# Altium PCB H bridge pcb.PcbDoc
Units mil, origin at the board's own origin, x right, y up, seen from the top; angles counter-clockwise.
Board outline 6000 x 4000 mil, 2 copper layers (Top Layer, Bottom Layer); 34 components, 6 nets, 68 pads, 0 vias.
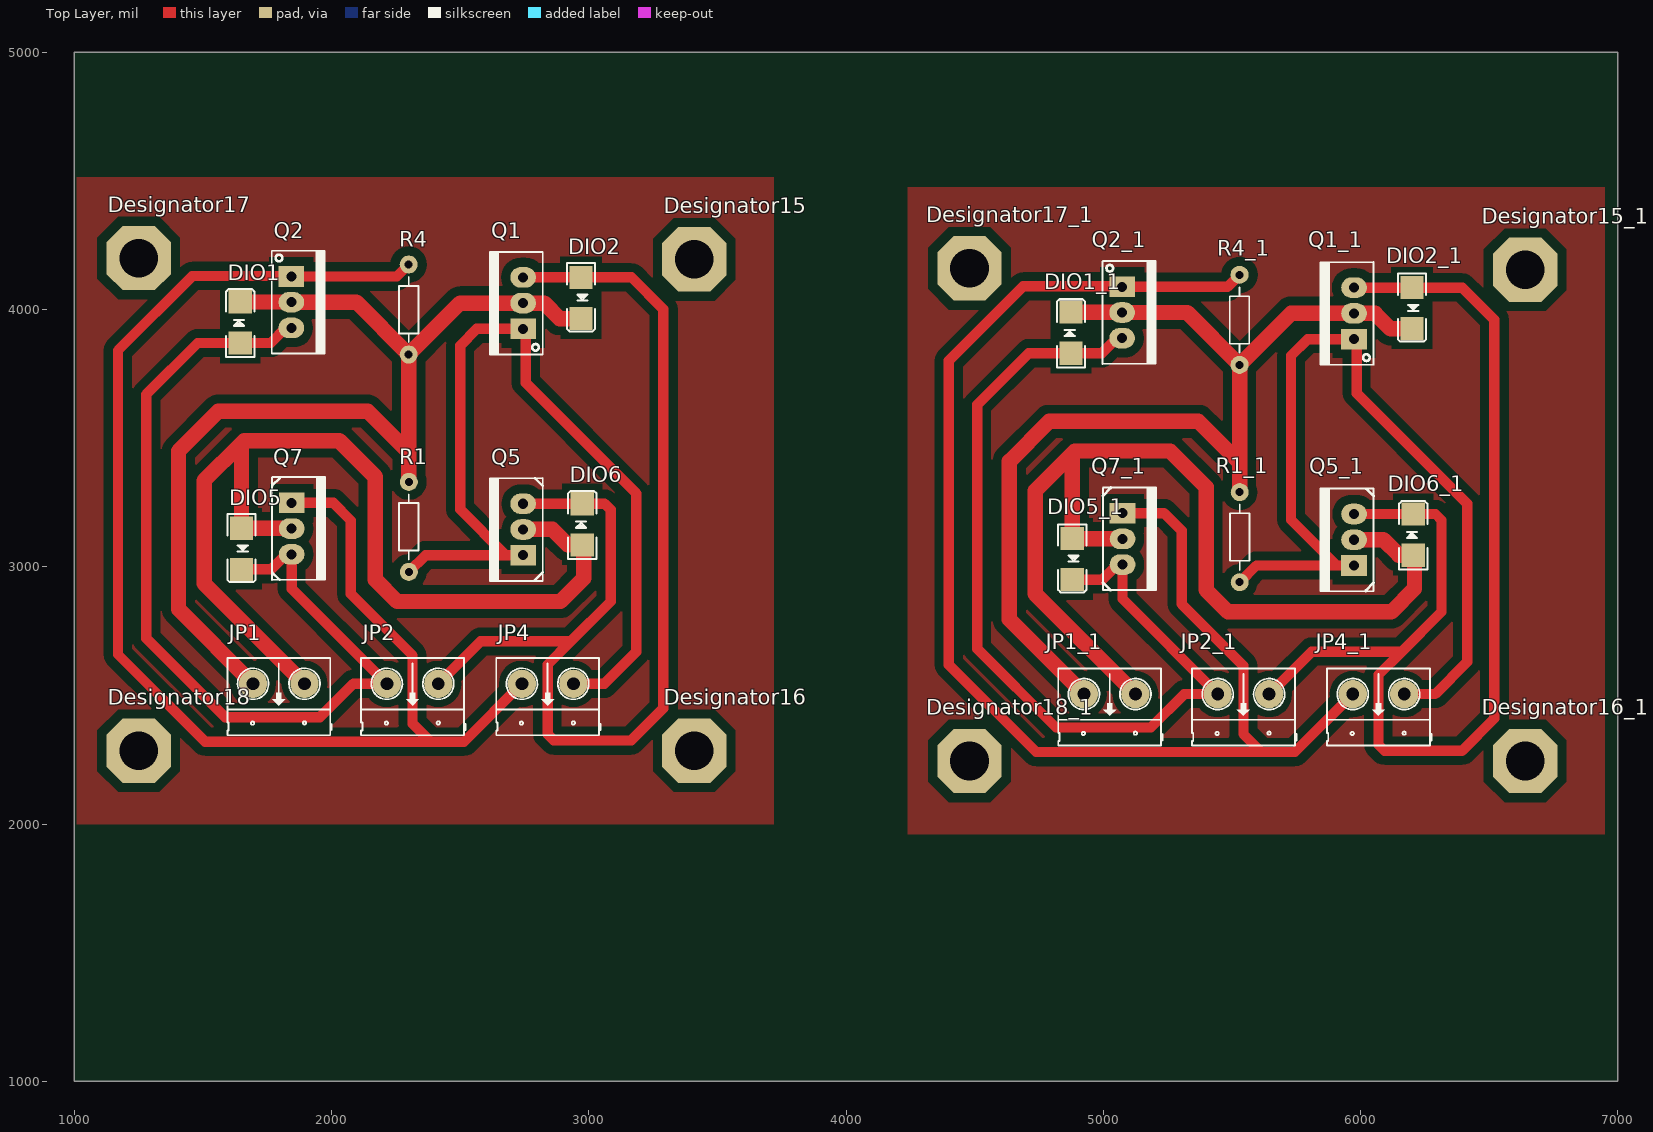
[diagram p0: Top Layer view]
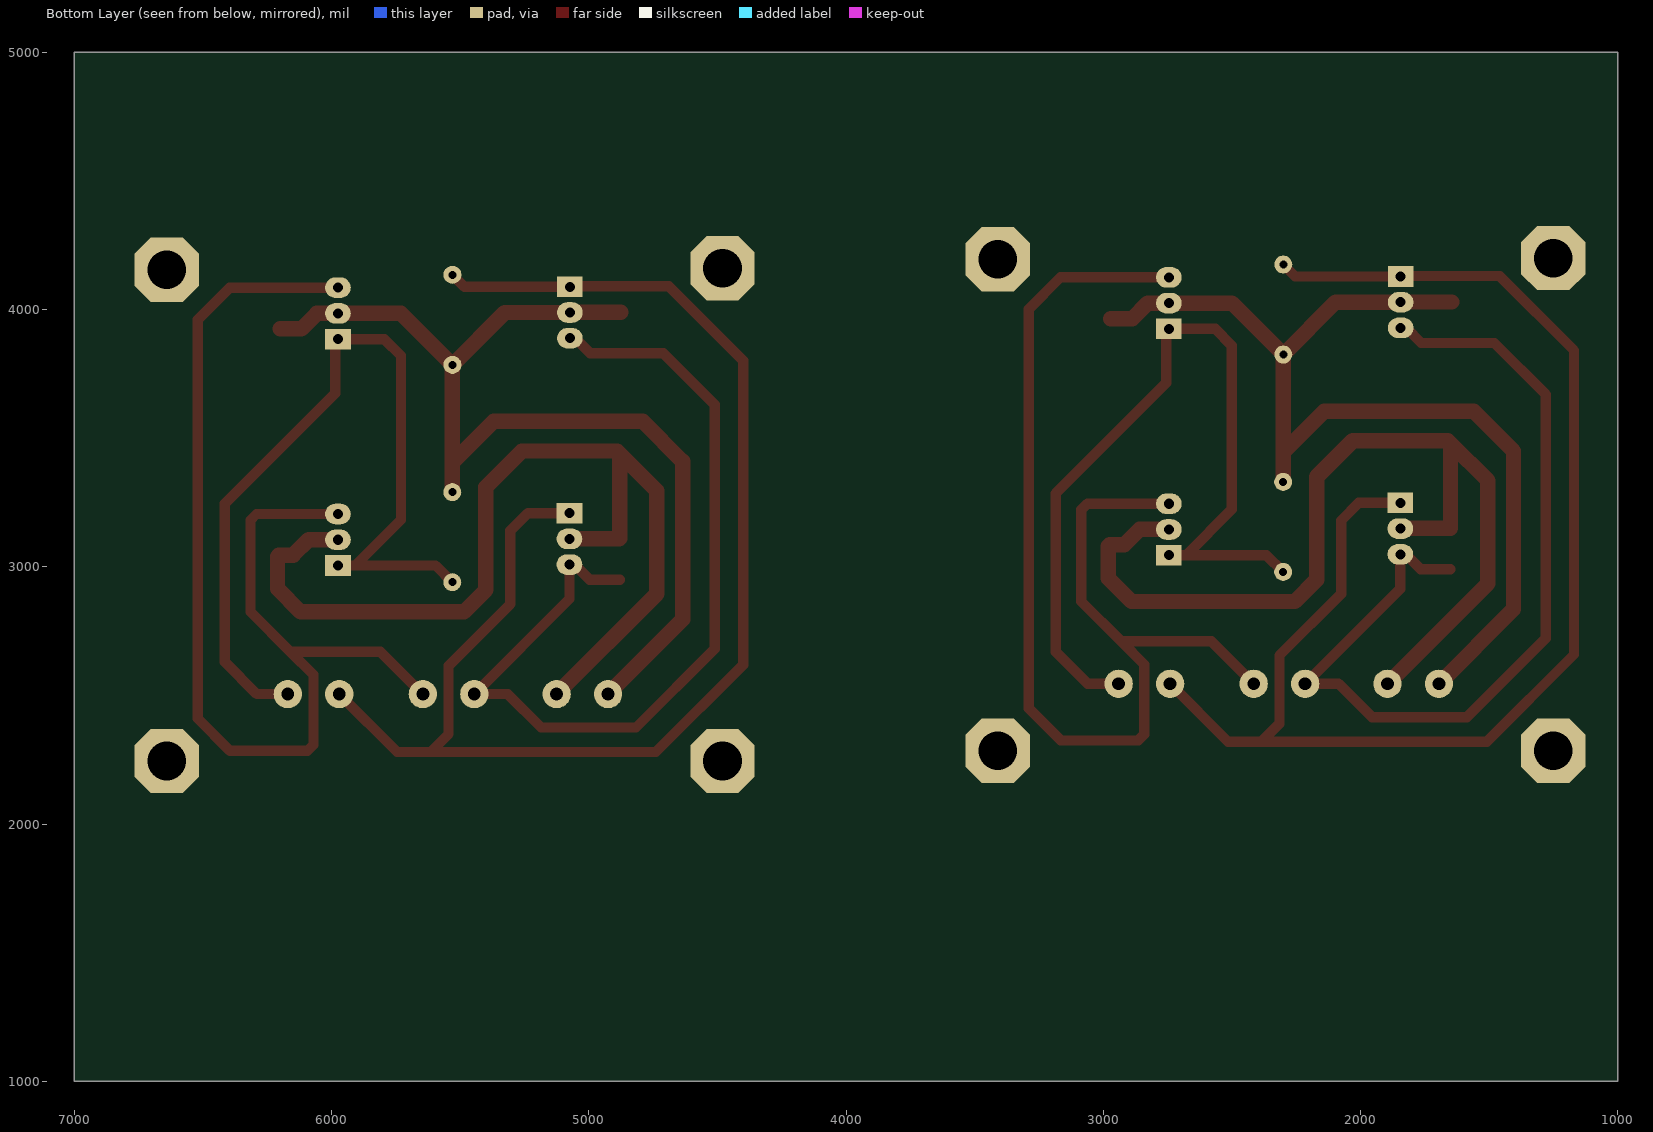
[diagram p1: Bottom Layer view, seen from below]
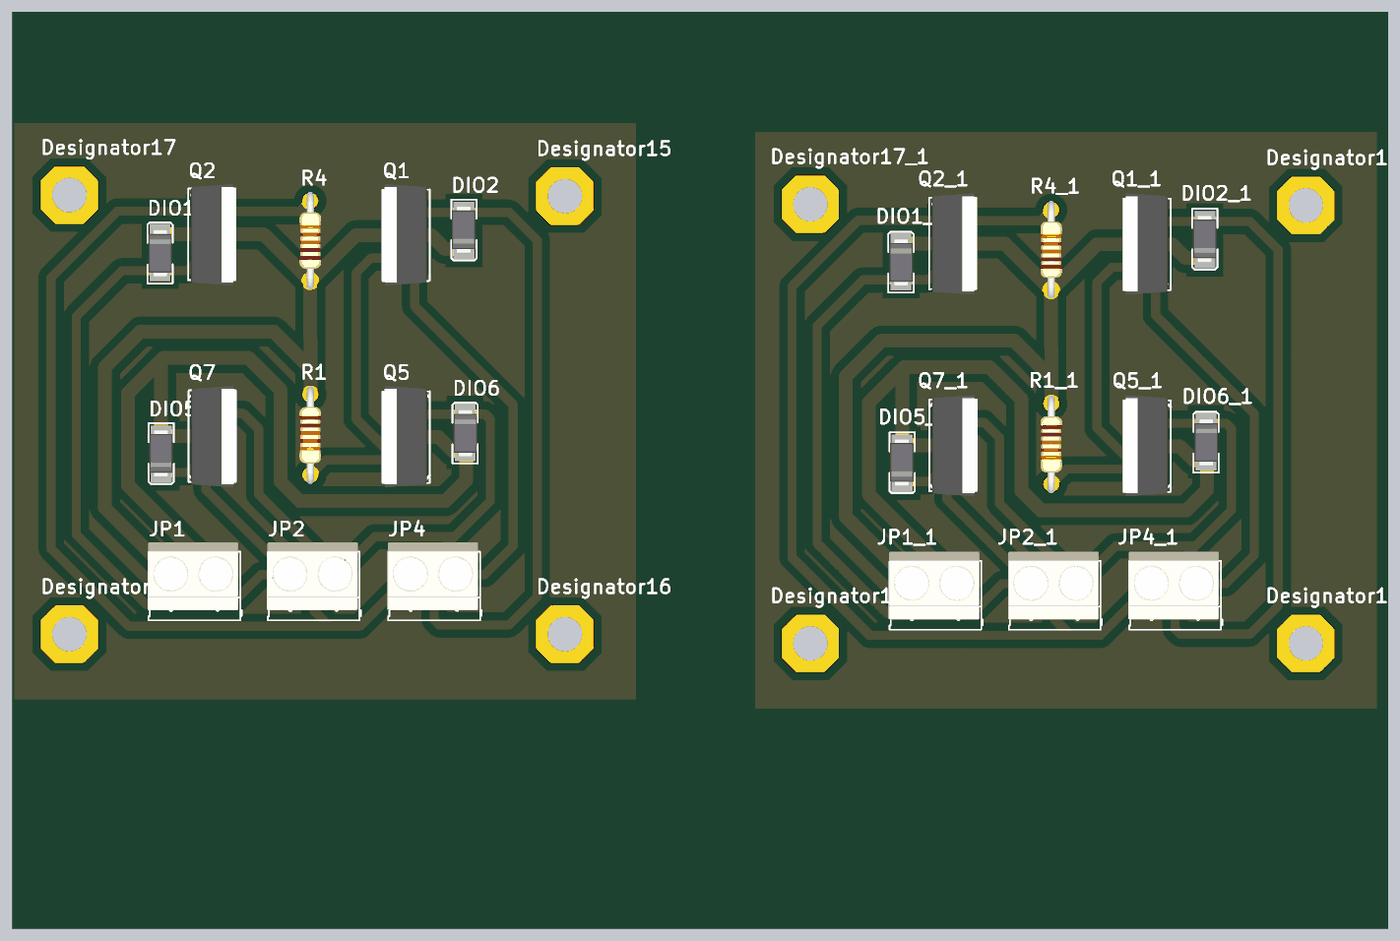
[diagram p2: 3D render of the assembled board from above, using the file's embedded part models]

## Layer stack, top to bottom
Top Solder: solder mask 0.4, Solder Resist, Dk 3.5
Top Layer: signal copper 1.4
Dielectric 1: dielectric 12.6, FR-4, Dk 4.8
Bottom Layer: signal copper 1.4
Bottom Solder: solder mask 0.4, Solder Resist, Dk 3.5

## Board outline
1000,1000 7000,1000 7000,5000 1000,5000

## Design rules (kind name [scope] priority, off if disabled: settings)
Clearance [All] p1: gap=35 ignorepadtopadclearanceinfootprint=FALSE
PlaneConnect [All] p1: planeconnectstyle=Relief reliefexpansion=20 reliefentries=4 reliefconductorwidth=20 reliefairgap=20
PolygonConnect [All] p1: connectstyle=Direct reliefconductorwidth=10 reliefentries=4 polygonreliefangle="90 Angle" airgapwidth=10
RoutingLayers [All] p1: top layer_v5=TRUE bottom layer_v5=FALSE
RoutingVias [All] p1: holewidth=28 width=50 viastyle="Through Hole" minholewidth=28 minwidth=50 maxholewidth=28 maxwidth=50
SolderMaskExpansion [All] p1: expansion=4 istentingtop=FALSE
Width [All] p1: maxlimit=60 minlimit=40 preferedwidth=50
28 further rules are at their usual default settings.

## Classes and differential pairs
component class "H bridge": DIO1 DIO2 DIO5 DIO6 JP1 JP2 JP4 Q1 Q2 Q5 Q7 R1 R4

## Components (designator, comment, footprint, x,y, rotation, side; value= is the part's Value field where it differs from the comment)
Designator15 "Comment" VIT 3410,4195 r0 top
Designator15_1 "Comment" VIT 6640,4155 r0 top
Designator16 "Comment" VIT 3410,2285 r0 top
Designator16_1 "Comment" VIT 6640,2245 r0 top
Designator17 "Comment" VIT 1250,4200 r0 top
Designator17_1 "Comment" VIT 4480,4160 r0 top
Designator18 "Comment" VIT 1250,2285 r0 top
Designator18_1 "Comment" VIT 4480,2245 r0 top
DIO1 "Diode SMD" DIO-SMD-106 1645,3950 r270 top value=1N5007
DIO1_1 "Diode SMD" DIO-SMD-106 4875,3910 r270 top value=1N5007 (schematic designator DIO1)
DIO2 "Diode SMD" DIO-SMD-106 2970,4045 r90 top value=1N5007
DIO2_1 "Diode SMD" DIO-SMD-106 6200,4005 r90 top value=1N5007 (schematic designator DIO2)
DIO5 "Diode SMD" DIO-SMD-106 1650,3070 r90 top value=1N5007
DIO5_1 "Diode SMD" DIO-SMD-106 4880,3030 r90 top value=1N5007 (schematic designator DIO5)
DIO6 "Diode SMD" DIO-SMD-106 2975,3165 r270 top value=1N5007
DIO6_1 "Diode SMD" DIO-SMD-106 6205,3125 r270 top value=1N5007 (schematic designator DIO6)
JP1 "Header 2_1" HED2 1895,2545 r180 top value="Header 2"
JP1_1 "Header 2_1" HED2 5125,2505 r180 top value="Header 2" (schematic designator JP1)
JP2 "Header 2_1" HED2 2415,2545 r180 top value="Header 2"
JP2_1 "Header 2_1" HED2 5645,2505 r180 top value="Header 2" (schematic designator JP2)
JP4 "Header 2_1" HED2 2940,2545 r180 top value="Header 2"
JP4_1 "Header 2_1" HED2 6170,2505 r180 top value="Header 2" (schematic designator JP4)
Q1 "IRF840" QTO-220 2745,3925 r90 top
Q1_1 "IRF840" QTO-220 5975,3885 r90 top (schematic designator Q1)
Q2 "IRF840" QTO-220 1843.5,4128.47 r270 top
Q2_1 "IRF840" QTO-220 5073.5,4088.47 r270 top (schematic designator Q2)
Q5 "IRF9540" QTO-220 2745,3045 r90 top
Q5_1 "IRF9540" QTO-220 5975,3005 r90 top (schematic designator Q5)
Q7 "IRF9540" QTO-220 1845,3248.46 r270 top
Q7_1 "IRF9540" QTO-220 5075,3208.46 r270 top (schematic designator Q7)
R1 "1k" R1/4W 2300.49,2980 r90 top value="R1/4W - 1K"
R1_1 "1k" R1/4W 5530.49,2940 r90 top value="R1/4W - 1K" (schematic designator R1)
R4 "1k" R1/4W 2300,4175 r270 top value="R1/4W - 1K"
R4_1 "1k" R1/4W 5530,4135 r270 top value="R1/4W - 1K" (schematic designator R4)

## Footprints (in the part's own frame and the unit in brackets; to place one, negate y for a bottom-side part, rotate by r counter-clockwise, add the part's x,y. Pads: shape width x height; smd on the part's side, far side on the other; paste and mask are expansions set on the pad)
DIO-SMD-106 [mil]
  rect 90x90.55 smd: 1(80,0) 2(-80,0)
  silkscreen extent -130,-55 135,55, body extent -99,-50 106,52, height 95
HED2 [mil] "Header 2, 2 pin, hight 300mil, Pin to Pin 200, Colour Green"
  round 110 hole 50: 1(0,0) 2(200,0)
  silkscreen extent -106,-100 300,200, body extent -92,-140 302,155, height 394
QTO-220 [mil] "TO-220 - 1-2-3"
  rect 80x100 hole 39: 1(0,0)
  oval 80x100 hole 39: 2(100,0) 3(200,0)
  silkscreen extent -100,-76 300,130, body extent -119,-64 322,121, height 755
R1/4W [mil] "R 1/4W, 2 Pin, 350mil"
  round 70 hole 31: 1(0,0) 2(350,0)
  silkscreen extent 48,-38 302,38, body extent -40,-47 386,47, height 111
VIT [mil] "VIT"
  oct 250x250 hole 150: VIT1(0,0)

## Part data
DIO1 DIO1_1 DIO2 DIO2_1 DIO5 DIO5_1 DIO6 DIO6_1: "Default Diode", Code - JEDEC=DO-214-AB, Published=8-Jun-2000, Publisher="Altium Limited", Revision="July-2002: Re-released for DXP Platform."
JP1 JP1_1 JP2 JP2_1 JP4 JP4_1: "Header, 2-Pin", Manufacturer="Generic Components", Class=Connector
Q1 Q1_1 Q2 Q2_1: "MOSFET N - CHANNEL 500V - 0.75 - 8A - TO-220"
Q5 Q5_1 Q7 Q7_1: "HEXFET P-Channel Power MOSFET", ComponentLink1Description="Manufacturer Link", ComponentLink1URL=http://www.irf.com/, ComponentLink2Description=Datasheet, ComponentLink2URL=http://www.irf.com/product-info/datasheets/data/irf9540.pdf, DatasheetVersion=PD-9.421C, LatestRevisionDate=17-Jul-2002, LatestRevisionNote="Re-released for DXP Platform.", Note="Pin 2 is electrically connected to pin 4.", PackageDescription="TO, Thru-Hole, Vertical, Heatsink Mounted; 3 In-Line Leads; Pitch 2.54 mm", PackageReference=TO-220AB, PackageVersion=Feb-1997, Published=8-Jun-2000, Publisher="Altium Limited"
R1 R1_1 R4 R4_1: library part R1/4W, "Resistor 1/4W"

## Nets (pads, with @x,y where several pads share a name; then routed paths per layer and width w, separated by ;. In a path a pad name is that pad's centre, name@x,y a point inside that pad or via, vN(x,y) a via of type N, cw(c..) or ccw(c..) an arc to the next point about the centre after c; other vN are vias at no path point)
+12: DIO1.2 DIO2.2 JP1.2 Q1.2 Q2.2 R1.2 R4.2 | length 4064.1
  Top Layer w40: DIO1.2 DIO1.2@1645.77,4029.23 ; Q2.2@1842.73,4029.23 Q2.2 ; 2300,3577.49 2300.49,3577
  Top Layer w60: DIO1.2@1645.77,4029.23 Q2.2@1842.73,4029.23 ; JP1.2 1405,2835 1405,3450 1560,3605 2140,3605 2300.49,3444.51 ; Q2.2 2096.53,4028.47 R4.2 ; 2300,3577.49 R4.2 ; R1.2 2300.49,3444.51 ; 2300.49,3577 2300.49,3444.51 ; DIO2.2 2887,3965 2827,4025 Q1.2 2500,4025 R4.2
GND: DIO5.1 DIO6.1 JP1.1 Q5.2 Q7.2 | length 3933.8
  Top Layer w40: DIO5.1 DIO5.1@1650.77,3149.23 ; 1650,3480 1660,3490 ; Q7.2@1844.23,3149.23 Q7.2 ; DIO6.1 DIO6.1@2980,3080
  Top Layer w60: DIO5.1 1650,3480 1505,3335 1505,2935 JP1.1 ; DIO5.1@1650.77,3149.23 Q7.2@1844.23,3149.23 ; 1660,3490 2030,3490 2170,3350 2170,2950 2255,2865 2890,2865 2980,2955 DIO6.1@2980,3080 ; Q5.2 2859,3145 2919,3085 DIO6.1
NetDIO1_1: DIO1.1 DIO5.2 JP2.2 Q2.3 Q7.3 | length 3610.9
  Top Layer w40: DIO5.2 1765.71,2990 1824.18,3048.46 Q7.3 1845,2915 JP2.2 2085,2545 1955,2415 1586.39,2415 1280,2721.39 1280,3670 1480,3870 DIO1.1 1764.21,3870 1822.68,3928.47 Q2.3
NetDIO2_1: DIO2.1 DIO6.2 JP2.1 Q1.3 Q5.3 | length 4566.5
  Top Layer w40: JP2.1 2580,2710 2930,2710 ; Q5.3 DIO6.2 3061.57,3245 3085,3221.57 3085,2865 2930,2710 ; Q1.3 DIO2.1 3166,4125 3290,4001 3290,2450 3165,2325 2863.43,2325 2840,2348.43 2840,2620 2930,2710
NetJP4_1: JP4.1 Q1.1 Q5.1 R1.1 | length 3372
  Top Layer w40: R1.1 2365.49,3045 2678,3045 ; Q5.1 2678,3045 ; JP4.1 3060,2545 3185,2670 3185,3285 2755,3715 2755,3925 2565,3925 2500,3860 2500,3223 2678,3045
NetJP4_2: JP4.2 Q2.1 Q7.1 R4.1 | length 5502
  Top Layer w40: Q7.1 2006.54,3248.46 2075,3180 2075,2895 2315,2655 2315,2390 2385,2320 ; R4.1 2253.47,4128.47 Q2.1 1841.97,4130 1459,4130 1170,3841 1170,2659 1509,2320 2385,2320 ; JP4.2 2515,2320 2385,2320
pads on no net: Designator15.VIT1 Designator15_1.VIT1 Designator16.VIT1 Designator16_1.VIT1 Designator17.VIT1 Designator17_1.VIT1 Designator18.VIT1 Designator18_1.VIT1 DIO1_1.1 DIO1_1.2 DIO2_1.1 DIO2_1.2 DIO5_1.1 DIO5_1.2 DIO6_1.1 DIO6_1.2 JP1_1.1 JP1_1.2 JP2_1.1 JP2_1.2 JP4_1.1 JP4_1.2 Q1_1.1 Q1_1.2 Q1_1.3 Q2_1.1 Q2_1.2 Q2_1.3 Q5_1.1 Q5_1.2 Q5_1.3 Q7_1.1 Q7_1.2 Q7_1.3 R1_1.1 R1_1.2 R4_1.1 R4_1.2
copper on no net: | length 25049.2
  Top Layer w40: 4875,3990 4875.77,3989.23 ; 4880,2950 4995.71,2950 5054.18,3008.46 5075,3008.46 5075,2875 5445,2505 5315,2505 5185,2375 4816.39,2375 4510,2681.39 4510,3630 4710,3830 4875,3830 4994.21,3830 5052.68,3888.47 5073.5,3888.47 ; 4880,3110 4880.77,3109.23 ; 4880,3440 4890,3450 ; 5072.73,3989.23 5073.5,3988.47 ; 5074.23,3109.23 5075,3108.46 ; 5075,3208.46 5236.54,3208.46 5305,3140 5305,2855 5545,2615 5545,2350 5615,2280 ; 5530,3537.49 5530.49,3537 ; 5530,4135 5483.47,4088.47 5073.5,4088.47 5071.97,4090 4689,4090 4400,3801 4400,2619 4739,2280 5615,2280 ; 5530.49,2940 5595.49,3005 5908,3005 ; 5645,2505 5810,2670 6160,2670 ; 5970,2505 5745,2280 5615,2280 ; 5975,3005 5908,3005 ; 5975,3205 6205,3205 6291.57,3205 6315,3181.57 6315,2825 6160,2670 ; 5975,4085 6200,4085 6396,4085 6520,3961 6520,2410 6395,2285 6093.43,2285 6070,2308.43 6070,2580 6160,2670 ; 6170,2505 6290,2505 6415,2630 6415,3245 5985,3675 5985,3885 5795,3885 5730,3820 5730,3183 5908,3005 ; 6205,3045 6210,3040
  Top Layer w60: 4875.77,3989.23 5072.73,3989.23 ; 4880,3110 4880,3440 4735,3295 4735,2895 5125,2505 ; 4880.77,3109.23 5074.23,3109.23 ; 4890,3450 5260,3450 5400,3310 5400,2910 5485,2825 6120,2825 6210,2915 6210,3040 ; 4925,2505 4635,2795 4635,3410 4790,3565 5370,3565 5530.49,3404.51 ; 5073.5,3988.47 5326.53,3988.47 5530,3785 ; 5530,3537.49 5530,3785 ; 5530.49,3290 5530.49,3404.51 ; 5530.49,3537 5530.49,3404.51 ; 5975,3105 6089,3105 6149,3045 6205,3045 ; 6200,3925 6117,3925 6057,3985 5975,3985 5730,3985 5530,3785

## Polygon pours and split planes (outlines as drawn)
no net on Top Layer "quyt" (solid, pour order 0): 1010,4515 3720,4515 3720,2000 1010,2000
no net on Top Layer "quyt" (solid, pour order 1): 4240,4475 6950,4475 6950,1960 4240,1960